# Altium PCB SmartLink.PcbDoc
Units mm, origin at the board's own origin, x right, y up, seen from the top; angles counter-clockwise.
Board outline 20 x 10 mm, 2 copper layers (Top Layer, Bottom Layer), stack 1.571 mm thick; 4 components, 4 nets, 16 pads, 26 vias.
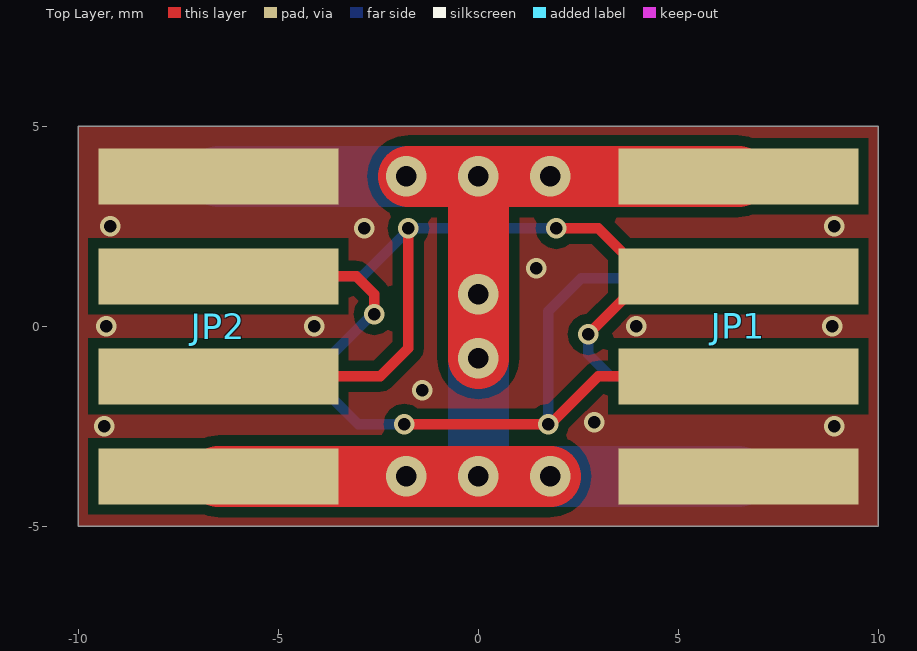
[diagram p0: Top Layer view]
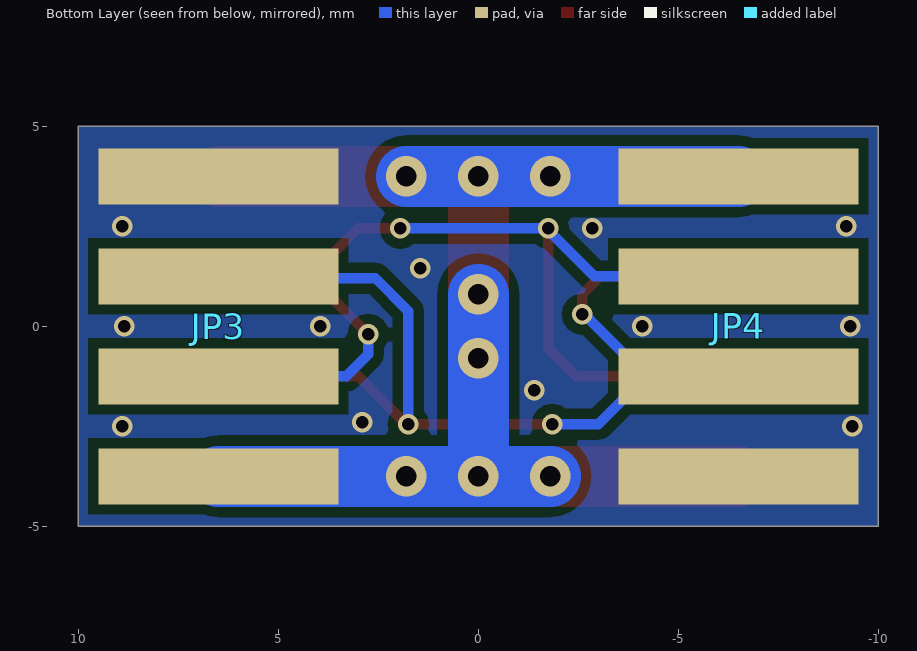
[diagram p1: Bottom Layer view, seen from below]

## Layer stack, top to bottom
Top Solder: solder mask 0.0102, Solder Resist, Dk 3.5
Top Layer: signal copper 0.0356
Dielectric 1: dielectric 1.5, FR-4, Dk 4.8
Bottom Layer: signal copper 0.0356
Bottom Solder: solder mask 0.0102, Solder Resist, Dk 3.5

## Board outline
-10,-5 10,-5 10,5 -10,5

## Design rules (kind name [scope] priority, off if disabled: settings)
Clearance [All] p1: gap=0.254 ignorepadtopadclearanceinfootprint=FALSE except(0: Arc-Hole Track-Hole SMDPad-Hole THPad-Hole Via-Hole Fill-Hole Poly-Hole Region-Hole Text-Hole)
PolygonConnect [InNet('GND')] p1: thpad.connectstyle=Relief thpad.reliefconductorwidth=0.254 thpad.reliefentries=4 thpad.polygonreliefangle="90 Angle" thpad.airgapwidth=0.254 smdpad.connectstyle=Direct smdpad.reliefconductorwidth=0.254 smdpad.reliefentries=4 smdpad.polygonreliefangle="90 Angle" smdpad.airgapwidth=0.254 via.connectstyle=Direct via.reliefconductorwidth=0.254 via.reliefentries=4 via.polygonreliefangle="90 Angle" via.airgapwidth=0.254
RoutingVias [All] p1: holewidth=0.305 width=0.508 viastyle="Through Hole" minholewidth=0.305 minwidth=0.508 maxholewidth=0.711 maxwidth=1.27
SolderMaskExpansion [All] p1: expansion=0.102
Width [All] p1: maxlimit=2.54 minlimit=0.254 preferedwidth=0.254
30 further rules are at their usual default settings.

## Components (designator, comment, footprint, x,y, rotation, side; value= is the part's Value field where it differs from the comment)
JP1 "BC-35-4P-TOUCH-FEET" BC-35-4P-TOUCH-FEET 6.5,0 r0 top
JP2 "BC-35-4P-TOUCH-FEET" BC-35-4P-TOUCH-FEET -6.5,0 r180 top
JP3 "BC-35-4P-TOUCH-FEET" BC-35-4P-TOUCH-FEET 6.5,0 r0 bottom
JP4 "BC-35-4P-TOUCH-FEET" BC-35-4P-TOUCH-FEET -6.5,0 r180 bottom

## Footprints (in the part's own frame and the unit in brackets; to place one, negate y for a bottom-side part, rotate by r counter-clockwise, add the part's x,y. Pads: shape width x height; smd on the part's side, far side on the other; paste and mask are expansions set on the pad)
BC-35-4P-TOUCH-FEET [mm] "连接插片"
  rect 6x1.4 smd: 1(0,3.75) 2(0,1.25) 3(0,-1.25) 4(0,-3.75)

## Via types
v1: diameter 0.508, hole 0.305, Top Layer to Bottom Layer, 18 vias
v2: diameter 1.016, hole 0.508, Top Layer to Bottom Layer, 8 vias

## Nets (pads, with @x,y where several pads share a name; then routed paths per layer and width w, separated by ;. In a path a pad name is that pad's centre, name@x,y a point inside that pad or via, vN(x,y) a via of type N, cw(c..) or ccw(c..) an arc to the next point about the centre after c; other vN are vias at no path point)
+12: JP1.1 JP2.1 JP3.1 JP4.1 | length 42.2
  Top Layer w1.524: JP2.1 v2(-1.8,-3.75) v2(0,-3.75) v2(1.8,-3.75) ; v2@-1.75,3.75 v2(0,3.75) ; v2(0,-0.8) v2(0,0.8) v2(0,3.75) ; JP1.1 v2(1.8,3.75) v2(0,3.75)
  Bottom Layer w1.524: JP4.1 v2(-1.8,3.75) v2(0,3.75) v2(1.8,3.75) ; v2(-1.8,-3.75) v2(0,-3.75) ; v2(0,0.8) v2(0,-0.8) v2(0,-3.75) ; JP3.1 v2(1.8,-3.75) v2(0,-3.75)
GND: JP1.4 JP2.4 JP3.4 JP4.4
  other v1: -9.35,-2.5 8.9,-2.5 2.9,-2.4 -1.4,-1.6 -9.3,0 -4.1,0 3.95,0 8.85,0 1.45,1.45 -2.85,2.45 -9.2,2.5 8.9,2.5
S: JP1.2 JP2.2 JP3.2 JP4.2 | length 28.6
  Top Layer w0.254: JP2.2 -2.452,-1.25 -1.75,-0.548 v1(-1.75,2.45) ; v1(1.95,2.45) 3,2.45 JP1.2@4.2,1.25 ; v1(2.75,-0.2) JP1.2@4.2,1.25 ; JP1.2 JP1.2@4.2,1.25
  Bottom Layer w0.254: JP4.2 -2.9,1.25 -1.7,2.45 v1(1.95,2.45) ; v1(2.75,-0.2) 2.75,-0.7 3.3,-1.25 JP3.2
U: JP1.3 JP2.3 JP3.3 JP4.3 | length 28.8
  Top Layer w0.254: JP2.3 -3.05,1.25 -2.6,0.8 v1(-2.6,0.3) ; v1(-1.85,-2.45) v1(1.75,-2.45) 1.8,-2.45 3,-1.25 JP1.3
  Bottom Layer w0.254: JP4.3 JP4.3@-4.2,-1.25 ; v1(-2.6,0.3) -2.65,0.3 JP4.3@-4.2,-1.25 ; v1(-1.85,-2.45) -3,-2.45 JP4.3@-4.2,-1.25 ; v1(1.75,-2.45) 1.75,0.38 2.57,1.2 6.45,1.2 JP3.3

## Polygon pours and split planes (outlines as drawn)
GND on Bottom Layer "GND_L02_P000" (solid, remove dead copper, pour order 0): -10,-5 10,-5 10,5 -10,5
GND on Top Layer "GND_L01_P001" (solid, remove dead copper, pour order 1): -10,-5 10,-5 10,5 -10,5

## Silkscreen, mask and mechanical layers (free items; w line width, h text height)
Mechanical 1:
  the board outline again, w0.254